# Altium PCB EPS.PcbDoc (part 2 of 2)
Units mm, origin at the board's own origin, x right, y up, seen from the top; angles counter-clockwise.
Board outline 98 x 78 mm, 4 copper layers (Top Layer, GND 1, GND 2, Bottom Layer), stack 1.592 mm thick; 124 components, 111 nets, 472 pads, 878 vias.
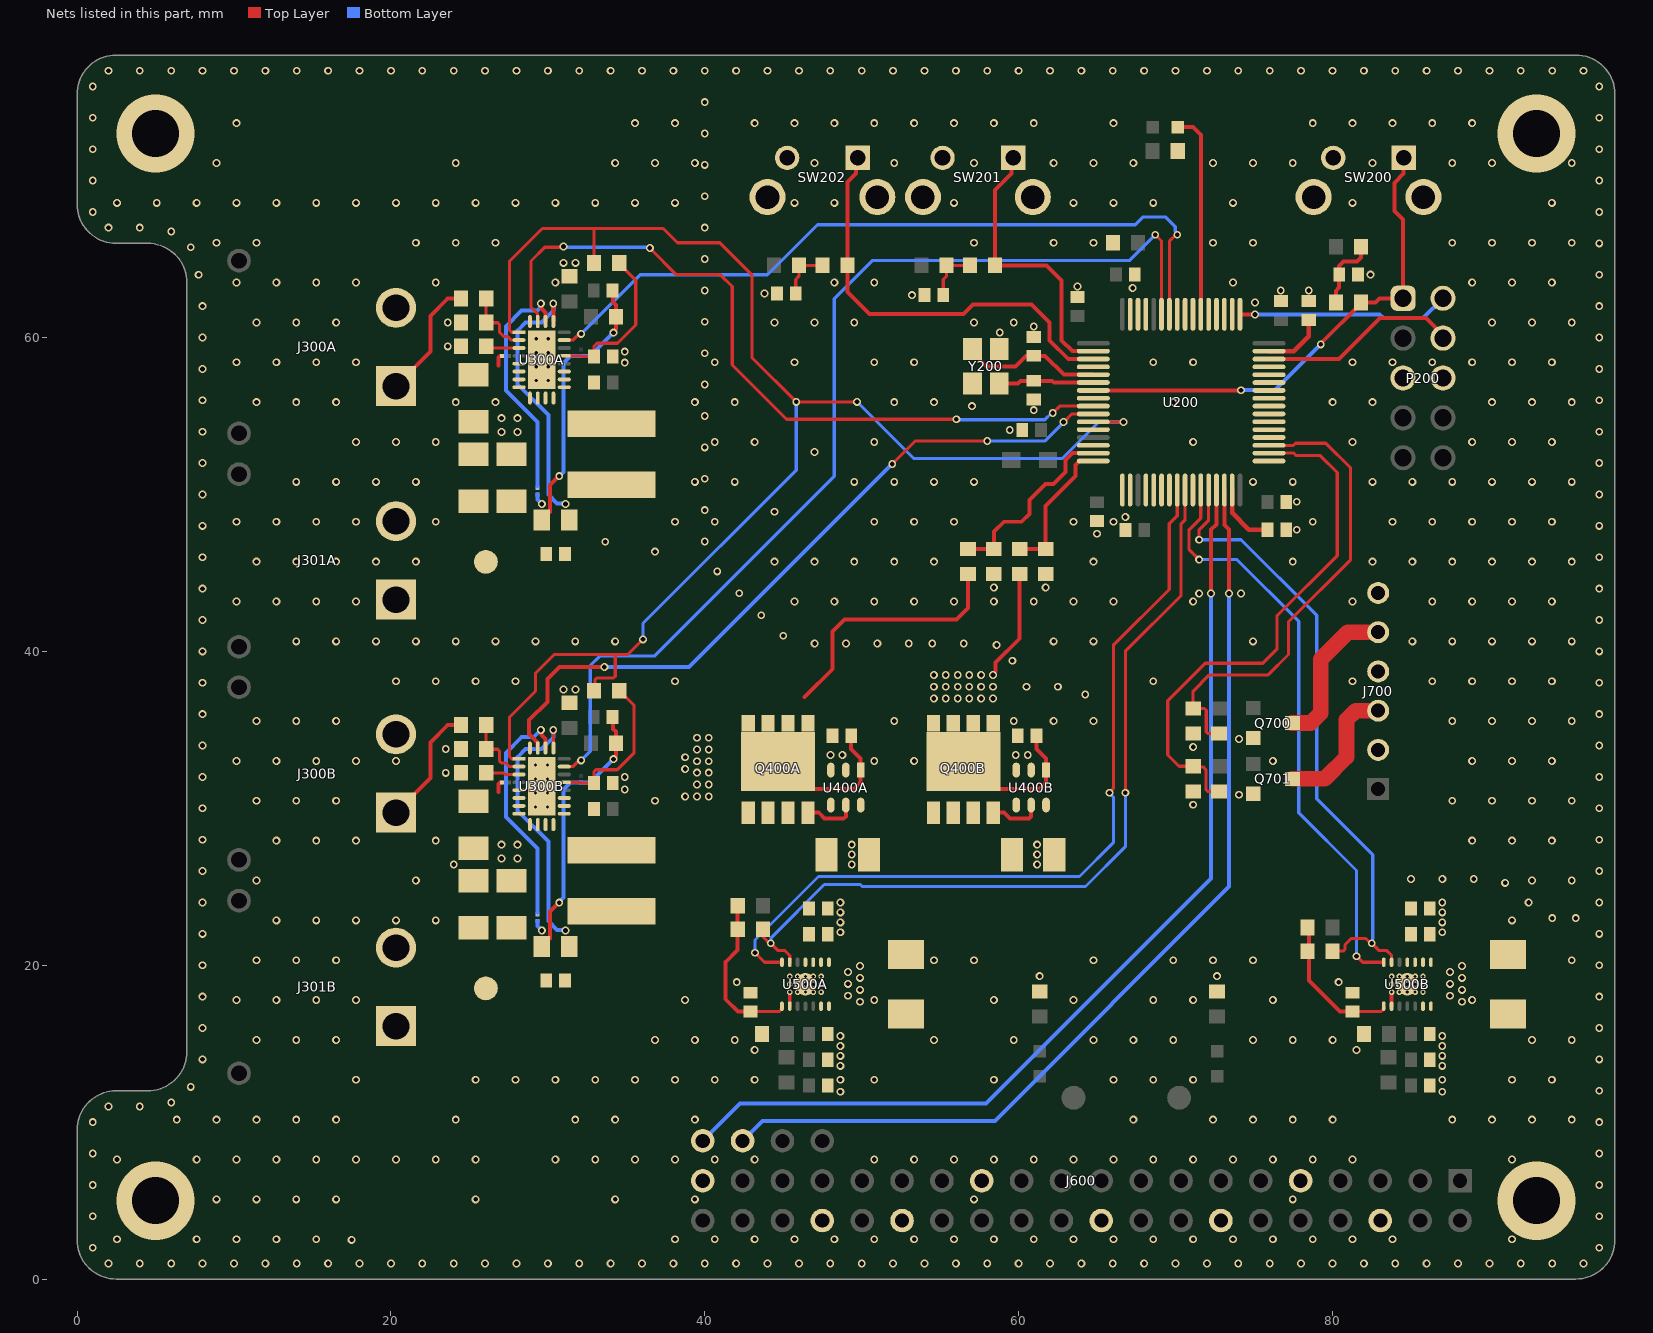
[diagram p4: the nets of this part, all layers, seen from the top]

## Via types
v1: diameter 0.5, hole 0.3, Top Layer to Bottom Layer, tented both sides, 828 vias
v2: diameter 0.35, hole 0.2, Top Layer to Bottom Layer, 30 vias
v3: diameter 0.5, hole 0.2, Top Layer to Bottom Layer, tented both sides, 16 vias
v4: diameter 5, hole 3, Top Layer to Bottom Layer, 4 vias

## Nets (pads, with @x,y where several pads share a name; then routed paths per layer and width w, separated by ;. In a path a pad name is that pad's centre, name@x,y a point inside that pad or via, vN(x,y) a via of type N, cw(c..) or ccw(c..) an arc to the next point about the centre after c; other vN are vias at no path point) (continued)
G_OR_A: Q400A.4 U400A.5 | length 3.4
  Top Layer w0.254: Q400A.4@46.574,29.718 47.263,29.718 47.644,29.337 48.838,29.337 48.987,29.486 U400A.5@48.987,30.209
G_OR_B: Q400B.4 U400B.5 | length 3.4
  Top Layer w0.254: Q400B.4@58.385,29.718 59.074,29.718 59.455,29.337 60.649,29.337 60.798,29.486 U400B.5@60.798,30.209
GND: C200.2 C201.2 C202.2 C203.2 C204.2 C205.2 C206.2 C207.2 C208.2 C209.2 C210.2 C211.2 C212.2 C213.2 C301A.1 C301B.1 C304A.1 C304B.1 C305A.1 C305B.1 C306A.2 C306B.2 C400A.2 C400B.2 C401A.1 C401B.1 C500A.2 C500B.2 C501A.2 C501B.2 C502A.2 C502B.2 C503A.2 C503B.2 C504A.2 C504B.2 C505A.2 C505B.2 J300A.N J300B.N J301A.N J301B.N J600.6 J600.9 J600.14 J600.20 J600.25 J600.30 J600.34 J600.39 J700.6 P200.5 P200.6 Q700.2 Q701.2 R202.1 R203.1 R210.1 R304A.1 R304B.1 R305A.1 R305B.1 R306A.1 R306B.1 R503A.1 R503B.1 R701.1 R703.1 R704.1 R705.1 R706.1 SW200.2 SW200.3 SW200.4 SW201.2 SW201.3 SW201.4 SW202.2 SW202.3 SW202.4 U200.12 U200.18 U200.63 U300A.7 U300A.8 U300A.9 U300A.10 U300A.11 U300A.12 U300A.25 U300B.7 U300B.8 U300B.9 U300B.10 U300B.11 U300B.12 U300B.25 U400A.2 U400A.3 U400B.2 U400B.3 U500A.2 U500A.15 U500B.2 U500B.15 Y200.2 Y200.4 | length 1.8
  Top Layer w0.24: U500A.2@45.414,17.391 v2(45.414,18.291) ; U500B.2@83.768,17.391 v2(83.768,18.291)
  other v1: 2,1 4,1 6,1 8,1 10,1 12,1 14,1 16,1 18,1 20,1 22,1 24,1 26,1 28,1 30,1 32,1 34,1 36,1 38,1 40,1 42,1 44,1 46,1 48,1 50,1 52,1 54,1 56,1 58,1 60,1 62,1 64,1 66,1 68,1 70,1 72,1 74,1 76,1 78,1 80,1 82,1 84,1 86,1 88,1 90,1 92,1 94,1 96,1 1,2 97,2 17.5,2.5 2.54,2.54 7.62,2.54 10.16,2.54 12.7,2.54 15.24,2.54 38.1,2.54 40.64,2.54 43.18,2.54 45.72,2.54 48.26,2.54 50.8,2.54 53.34,2.54 55.88,2.54 58.42,2.54 60.96,2.54 63.5,2.54 66.04,2.54 68.58,2.54 71.12,2.54 73.66,2.54 76.2,2.54 78.74,2.54 81.28,2.54 83.82,2.54 91.44,2.54 1,4 97,4 8.89,5.08 11.43,5.08 13.97,5.08 16.51,5.08 25.4,5.08 34.29,5.08 39.37,5.08 57.15,5.08 77.47,5.08 1,6 97,6 2.54,7.62 7.62,7.62 10.16,7.62 12.7,7.62 15.24,7.62 17.78,7.62 20.32,7.62 22.86,7.62 25.4,7.62 30.48,7.62 33.02,7.62 35.56,7.62 38.1,7.62 40.64,7.62 43.18,7.62 50.8,7.62 53.34,7.62 55.88,7.62 58.42,7.62 60.96,7.62 63.5,7.62 66.04,7.62 68.58,7.62 71.12,7.62 73.66,7.62 76.2,7.62 78.74,7.62 81.28,7.62 91.44,7.62 1,8 97,8 1,10 97,10 6.35,10.16 8.89,10.16 11.43,10.16 13.97,10.16 16.51,10.16 24.13,10.16 31.75,10.16 34.29,10.16 39.37,10.16 67.31,10.16 72.39,10.16 74.93,10.16 77.47,10.16 80.01,10.16 87.63,10.16 90.17,10.16 92.71,10.16 95.25,10.16 2,11 4,11 6,11.25 48.641,11.938 86.995,11.938 97,12 7.25,12.25 17.78,12.7 25.4,12.7 27.94,12.7 30.48,12.7 33.02,12.7 35.56,12.7 38.1,12.7 40.64,12.7 43.18,12.7 48.641,12.7 50.8,12.7 58.42,12.7 66.04,12.7 68.58,12.7 71.12,12.7 86.995,12.7 91.44,12.7 93.98,12.7 48.641,13.589 86.995,13.589 8,14 97,14 48.641,14.224 86.995,14.224 43.18,14.605 81.534,14.605 48.641,14.859 86.995,14.859 11.43,15.24 13.97,15.24 16.51,15.24 36.83,15.24 39.37,15.24 41.91,15.24 54.61,15.24 59.69,15.24 64.77,15.24 67.31,15.24 69.85,15.24 74.93,15.24 77.47,15.24 80.01,15.24 92.71,15.24 95.25,15.24 48.641,15.494 86.995,15.494 8,16 97,16 49.895,17.67 88.249,17.67 10.16,17.78 12.7,17.78 15.24,17.78 17.78,17.78 38.735,17.78 50.8,17.78 58.42,17.78 63.5,17.78 68.58,17.78 71.12,17.78 76.2,17.78 88.9,17.78 8,18 97,18 49.133,18.051 87.487,18.051 49.895,18.432 88.249,18.432 49.133,18.813 87.487,18.813 42.037,18.923 80.391,18.923 49.895,19.194 88.249,19.194 61.341,19.304 72.644,19.304 49.133,19.575 87.487,19.575 49.895,19.956 88.249,19.956 8,20 97,20 11.43,20.32 13.97,20.32 16.51,20.32 54.61,20.32 57.15,20.32 64.77,20.32 69.85,20.32 72.39,20.32 74.93,20.32 95.25,20.32 8,22 97,22 48.641,22.098 86.995,22.098 48.641,22.733 86.995,22.733 12.7,22.86 15.24,22.86 17.78,22.86 20.32,22.86 22.86,22.86 91.44,22.86 94,23 95.5,23 48.641,23.368 86.995,23.368 8,24 48.641,24.003 86.995,24.003 92.5,24 97,24 91,25.25 11.43,25.4 21.59,25.4 92.71,25.4 95.25,25.4 85,25.5 87,25.5 89,25.5 8,26 97,26 24.003,26.416 49.368,26.416 61.179,26.416 27.051,26.797 28.067,26.797 49.368,27.051 61.179,27.051 27.051,27.686 28.067,27.686 49.368,27.686 61.179,27.686 12.7,27.94 15.24,27.94 17.78,27.94 22.86,27.94 88.9,27.94 91.44,27.94 93.98,27.94 8,28 97,28 8,30 97,30 71.12,30.226 11.43,30.48 13.97,30.48 16.51,30.48 36.83,30.48 87.63,30.48 90.17,30.48 92.71,30.48 95.25,30.48 74.041,30.861 34.9,31.2 8,32 34.9,32 97,32 23.495,32.258 10.16,33.02 12.7,33.02 15.24,33.02 17.78,33.02 20.32,33.02 50.8,33.02 53.34,33.02 76.2,33.02 88.9,33.02 91.44,33.02 93.98,33.02 48.006,33.401 48.768,33.401 59.817,33.401 60.579,33.401 23.495,33.782 71.12,33.909 8,34 97,34 74.041,34.417 11.43,35.56 13.97,35.56 16.51,35.56 52.07,35.56 59.69,35.56 62.23,35.56 64.77,35.56 87.63,35.56 90.17,35.56 92.71,35.56 95.25,35.56 8,36 97,36 64.25,37.25 31.003,37.577 31.765,37.577 60.5,37.75 62.5,37.75 8,38 97,38 20.32,38.1 22.86,38.1 25.4,38.1 27.94,38.1 38.1,38.1 68.58,38.1 81.28,38.1 86.36,38.1 88.9,38.1 91.44,38.1 93.98,38.1 59.6,39.4 8,40 97,40 58.6,40.4 47,40.5 49,40.5 51,40.5 53,40.5 54.5,40.5 56.5,40.5 13.97,40.64 16.51,40.64 19.05,40.64 21.59,40.64 24.13,40.64 26.67,40.64 29.21,40.64 31.75,40.64 34.29,40.64 62.23,40.64 64.77,40.64 74.93,40.64 85.09,40.64 87.63,40.64 90.17,40.64 92.71,40.64 95.25,40.64 45,41 8,42 97,42 43.6,42.3 10.16,43.18 12.7,43.18 15.24,43.18 17.78,43.18 45.72,43.18 48.26,43.18 50.8,43.18 53.34,43.18 55.88,43.18 58.42,43.18 60.96,43.18 63.5,43.18 66.04,43.18 71.12,43.18 81.28,43.18 86.36,43.18 88.9,43.18 91.44,43.18 93.98,43.18 42.2,43.7 71.501,43.688 74.168,43.688 8,44 97,44 58.42,44.069 61.722,44.069 40.8,45.1 11.43,45.72 13.97,45.72 16.51,45.72 19.05,45.72 21.59,45.72 44.45,45.72 46.99,45.72 49.53,45.72 52.07,45.72 54.61,45.72 64.77,45.72 77.47,45.72 82.55,45.72 85.09,45.72 87.63,45.72 90.17,45.72 92.71,45.72 95.25,45.72 8,46 97,46 36.83,46.355 33.655,46.99 40,47 65,47.5 77.724,47.752 8,48 97,48 10.16,48.26 12.7,48.26 15.24,48.26 17.78,48.26 22.86,48.26 38.1,48.26 40.64,48.26 50.8,48.26 53.34,48.26 55.88,48.26 63.5,48.26 66.04,48.26 78.74,48.26 83.82,48.26 86.36,48.26 88.9,48.26 91.44,48.26 93.98,48.26 66.802,48.565 44.45,48.895 40,49 77.724,49.53 8,50 97,50 13.97,50.8 16.51,50.8 19.05,50.8 21.59,50.8 39.37,50.8 41.91,50.8 49.53,50.8 52.07,50.8 54.61,50.8 57.15,50.8 74.93,50.8 77.47,50.8 82.55,50.8 85.09,50.8 87.63,50.8 90.17,50.8 92.71,50.8 95.25,50.8 40,51 8,52 97,52 46.99,52.705 40,53 17.78,53.34 20.32,53.34 22.86,53.34 40.64,53.34 43.18,53.34 50.8,53.34 71.12,53.34 81.28,53.34 88.9,53.34 91.44,53.34 93.98,53.34 27.051,53.975 28.067,53.975 8,54 97,54 59.436,54.102 27.051,54.864 28.067,54.864 40,55 60.96,55.372 57.023,55.626 11.43,55.88 13.97,55.88 16.51,55.88 24.13,55.88 26.67,55.88 39.37,55.88 41.91,55.88 52.07,55.88 54.61,55.88 69.85,55.88 80.01,55.88 82.55,55.88 90.17,55.88 92.71,55.88 95.25,55.88 8,56 97,56 40,57 8,58 97,58 34.9,58.4 10.16,58.42 12.7,58.42 15.24,58.42 17.78,58.42 40.64,58.42 45.72,58.42 50.8,58.42 53.34,58.42 68.58,58.42 71.12,58.42 81.28,58.42 83.82,58.42 86.36,58.42 88.9,58.42 91.44,58.42 93.98,58.42 40,59 34.9,59.1 23.622,59.436 8,60 97,60 58.801,60.325 60.96,60.706 11.43,60.96 13.97,60.96 16.51,60.96 23.622,60.96 44.45,60.96 46.99,60.96 49.53,60.96 57.15,60.96 59.69,60.96 90.17,60.96 92.71,60.96 95.25,60.96 40,61 8,62 97,62 75.057,62.23 53.2,62.7 43.8,62.8 40,63 76.708,62.992 78.486,62.992 67.267,63.155 63.754,63.246 10.16,63.5 12.7,63.5 15.24,63.5 17.78,63.5 22.86,63.5 30.48,63.5 48.26,63.5 50.8,63.5 73.66,63.5 88.9,63.5 91.44,63.5 93.98,63.5 7.75,64 82.423,64.008 97,64 31.003,64.755 31.765,64.755 40,65 7.25,65.75 97,66 8.89,66.04 11.43,66.04 21.59,66.04 24.13,66.04 26.67,66.04 57.15,66.04 62.23,66.04 64.77,66.04 72.39,66.04 74.93,66.04 87.63,66.04 90.17,66.04 92.71,66.04 95.25,66.04 6,66.75 2,67 4,67 40,67 1,68 97,68 2.54,68.58 5.08,68.58 7.62,68.58 10.16,68.58 12.7,68.58 15.24,68.58 17.78,68.58 20.32,68.58 22.86,68.58 25.4,68.58 27.94,68.58 30.48,68.58 33.02,68.58 35.56,68.58 38.1,68.58 45.72,68.58 48.26,68.58 55.88,68.58 63.5,68.58 66.04,68.58 68.58,68.58 73.66,68.58 81.28,68.58 93.98,68.58 40,69 1,70 97,70 40,71 8.89,71.12 24.13,71.12 34.29,71.12 36.83,71.12 39.37,71.12 46.99,71.12 52.07,71.12 57.15,71.12 62.23,71.12 64.77,71.12 67.31,71.12 72.39,71.12 74.93,71.12 77.47,71.12 82.55,71.12 87.63,71.12 90.17,71.12 95.25,71.12 1,72 97,72 40,73 10.16,73.66 35.56,73.66 38.1,73.66 43.18,73.66 45.72,73.66 48.26,73.66 50.8,73.66 53.34,73.66 55.88,73.66 58.42,73.66 60.96,73.66 66.04,73.66 78.74,73.66 81.28,73.66 83.82,73.66 86.36,73.66 88.9,73.66 1,74 97,74 40,75 1,76 97,76 2,77 4,77 6,77 8,77 10,77 12,77 14,77 16,77 18,77 20,77 22,77 24,77 26,77 28,77 30,77 32,77 34,77 36,77 38,77 40,77 42,77 44,77 46,77 48,77 50,77 52,77 54,77 56,77 58,77 60,77 62,77 64,77 66,77 68,77 70,77 72,77 74,77 76,77 78,77 80,77 82,77 84,77 86,77 88,77 90,77 92,77 94,77 96,77
  other v2: 45.914,18.291 46.414,18.291 46.914,18.291 47.414,18.291 84.268,18.291 84.768,18.291 85.268,18.291 85.768,18.291 45.414,18.791 45.914,18.791 46.414,18.791 46.914,18.791 47.414,18.791 83.768,18.791 84.268,18.791 84.768,18.791 85.268,18.791 85.768,18.791 45.414,19.291 45.914,19.291 46.414,19.291 46.914,19.291 47.414,19.291 83.768,19.291 84.268,19.291 84.768,19.291 85.268,19.291 85.768,19.291
  other v3: 29.225,30.084 29.987,30.084 29.225,30.973 29.987,30.973 29.225,31.862 29.987,31.862 29.225,32.751 29.987,32.751 29.261,57.252 30.023,57.252 29.261,58.141 30.023,58.141 29.261,59.03 30.023,59.03 29.261,59.919 30.023,59.919
  other v4: 5,5 93,5 5,73 93,73
ICTRLA: U300A.24
ICTRLB: U300B.24
IMON1: U200.9 U300A.23 | length 48.1
  Top Layer w0.2: U300A.23@29.356,61.024 29.348,61.032 29.348,61.508 28.931,61.925 28.931,64.872 29.809,65.75 30.95,65.75 v1(31,65.8) ; v1(36.5,65.7) 38.192,64.008 40.992,64.008 41.75,63.25 41.75,58.25 45.212,54.788 v1(56.032,54.788) ; v1(62.179,55.194) 62.615,55.63 U200.9@64.758,55.63
  Bottom Layer w0.2: v1(31,65.8) 31.05,65.75 36.45,65.75 v1(36.5,65.7) ; v1(56.032,54.788) 56.058,54.762 61.666,54.762 62.098,55.194 v1(62.179,55.194)
IMON2: U200.10 U300B.23 | length 46.9
  Top Layer w0.2: v1(51.943,51.943) 53.4,53.4 v1(58,53.4) ; v1(62.865,54.61) 63.385,55.13 U200.10@64.758,55.13
  Top Layer w0.254: U300B.23@29.356,33.845 29.356,34.195 28.813,34.737 28.813,35.621 29.972,36.779 29.972,38.227 30.745,39 v1(33.6,39)
  Bottom Layer w0.2: v1(58,53.4) 61.655,53.4 v1(62.865,54.61)
  Bottom Layer w0.254: v1(33.6,39) 39,39 v1(51.943,51.943)
INTVccA: C306A.1 R302A.2 U300A.17 | length 10.2
  Top Layer w0.2: U300A.17@31.047,58.833 32.099,58.833 32.146,58.786 C306A.1@32.943,58.786 32.943,59.443 33.136,59.636 34.436,59.636 35.6,60.8 35.6,63.65 34.55,64.7 R302A.2@34.55,64.75
INTVccB: C306B.1 R302B.2 U300B.17 | length 10.1
  Top Layer w0.2: U300B.17@31.047,31.655 32.099,31.655 32.146,31.608 C306B.1@32.943,31.608 32.943,32.341 33.06,32.458 34.418,32.458 35.5,33.54 35.5,36.55 34.95,37.1 34.9,37.1 34.55,37.45 R302B.2@34.55,37.5
ISNA: NT301A.1 U300A.22 | length 15.2
  Top Layer w0.254: v1(29.555,62.164) 29.602,62.117 29.602,61.838 29.856,61.584 U300A.22@29.856,61.024
  Bottom Layer w0.254: NT301A.1@29.337,50.536 29.337,54.61 27.32,56.627 27.32,60.691 28.336,61.707 29.33,61.707 29.508,61.885 29.508,62.117 v1(29.555,62.164)
ISNB: NT301B.1 U300B.22 | length 15.1
  Top Layer w0.254: v1(29.555,34.986) 29.602,34.939 29.602,34.66 29.856,34.406 U300B.22@29.856,33.845
  Bottom Layer w0.254: NT301B.1@29.337,23.358 29.337,27.432 27.32,29.449 27.32,33.513 28.336,34.529 29.098,34.529 v1(29.555,34.986)
ISPA: C302A.1 L300A.2 R300A.1 U300A.21 | length 17
  Top Layer w0.254: v1(30.343,62.164) 30.35,62.157 30.35,61.029 U300A.21@30.356,61.024
  Bottom Layer w0.254: v1(30.343,62.164) 30.368,62.139 30.368,61.707 29.606,60.945 28.59,60.945 28.082,60.437 28.082,57.008 30.038,55.052 30.038,49.994 30.597,49.435 31.083,49.435 v1(31.13,49.388)
ISPB: C302B.1 L300B.2 R300B.1 U300B.21 | length 17
  Top Layer w0.2: v1(30.343,34.986) 30.35,34.979 30.35,33.851 U300B.21@30.356,33.845
  Bottom Layer w0.254: v1(30.343,34.986) 30.368,34.961 30.368,34.529 29.606,33.767 28.59,33.767 28.082,33.259 28.082,29.83 30.038,27.874 30.038,22.816 30.597,22.257 31.083,22.257 v1(31.13,22.21)
L1A: L500A.1 U500A.8 U500A.9
L1B: L500B.1 U500B.8 U500B.9
L2A: L500A.2 U500A.6 U500A.7
L2B: L500B.2 U500B.6 U500B.7
MODE_3V3: R500A.2 U200.25 U500A.13 | length 52.9
  Top Layer w0.2: R500A.2@43.7,22.3 43.7,21.817 43.817,21.7 43.819,21.7 44.119,21.4 v1(44.2,21.4) 44.651,20.949 45.081,20.949 45.414,20.617 U500A.13@45.414,20.191 ; v1(66.802,30.988) 66.802,40.005 70.358,43.561 70.358,48.133 70.612,48.387 70.612,50.276 U200.25@70.608,50.28
  Bottom Layer w0.2: v1(44.2,21.4) 44.228,21.428 44.228,21.749 47.625,25.146 49.911,25.146 50.038,25.019 64.262,25.019 66.802,27.559 v1(66.802,30.988)
MODE_5V: R500B.2 U200.28 U500B.13 | length 40.4
  Top Layer w0.2: v1(71.501,47.117) 71.501,47.752 72.108,48.359 U200.28@72.108,50.28 ; R500B.2@80,20.9 80.683,20.9 80.8,21.017 80.8,21.3 81.2,21.7 82.119,21.7 82.419,21.4 v1(82.5,21.4) 82.951,20.949 83.435,20.949 83.768,20.617 U500B.13@83.768,20.191
  Bottom Layer w0.2: v1(71.501,47.117) 74.168,47.117 78.994,42.291 78.994,30.607 82.568,27.033 82.568,21.667 82.557,21.657 82.557,21.457 v1(82.5,21.4)
NRST: P200.1 R207.1 SW200.1 U200.7 | length 31.7
  Top Layer w0.254: U200.7@64.758,56.63 64.764,56.636 74.162,56.636 v1(74.168,56.642) ; v1(79.248,59.563) 79.248,59.602 81.826,62.18 R207.1@81.826,62.23 82.728,62.23 82.998,62.5 P200.1@84.5,62.5 84.5,67.519 83.947,68.072 83.947,69.85 84.539,70.442 84.539,71.442 SW200.1@84.546,71.449
  Bottom Layer w0.254: v1(74.168,56.642) 76.327,56.642 v1(79.248,59.563)
NRST_NDB: C207.1 R204.1 R207.2 | length 4.7
  Top Layer w0.254: R207.2@80.226,62.23 80.226,62.979 80.426,63.179 C207.1@80.426,64.008 ; C207.1@80.416,64.018 80.416,64.567 80.696,64.846 81.559,64.846 81.826,65.113 R204.1@81.826,65.786
OSC_IN: C211.1 U200.5 Y200.3 | length 9.1
  Top Layer w0.254: Y200.3@57.062,59.266 57.535,58.793 57.535,58.568 57.937,58.166 59.812,58.166 60.482,58.836 61.687,58.836 62.893,57.63 U200.5@64.758,57.63
OSC_OUT: C210.1 U200.6 Y200.1 | length 6.1
  Top Layer w0.254: Y200.1@58.762,57.066 59.95,57.066 60.126,57.242 C210.1@60.96,57.242 62.138,57.242 62.25,57.13 U200.6@64.758,57.13
PA0: U200.14
PA3: U200.17
PA4: U200.20
PA5: U200.21
PA6: U200.22
PA7: U200.23
PA8: U200.41
PA9: U200.42
PA10: U200.43
PA11: U200.44
PA12: U200.45
PA15: U200.50
PB0: U200.26
PB3: U200.55
PB4: U200.56
PB5: U200.57
PB8: U200.61
PB9: U200.62
PB12: U200.33
PB15: U200.36
PC0: U200.8
PC6: U200.37
PC7: U200.38
PC8: U200.39
PC9: U200.40
PC10: U200.51
PC11: U200.52
PC12: U200.53
PC15: U200.4
PG_3V3: U200.24 U500A.14 | length 52.5
  Top Layer w0.2: v1(43.2,20.8) 43.809,20.191 U500A.14@44.914,20.191 ; v1(65.786,30.988) 65.786,31.001 66.04,31.255 66.04,40.386 69.596,43.942 69.596,48.133 70.108,48.645 U200.24@70.108,50.28
  Bottom Layer w0.2: v1(43.2,20.8) 43.2,21.61 47.244,25.654 63.881,25.654 66.04,27.813 66.04,30.721 65.786,30.975 v1(65.786,30.988)
PG_5V: U200.27 U500B.14 | length 37.7
  Top Layer w0.2: v1(71.501,45.847) 70.866,46.482 70.866,47.752 71.608,48.494 U200.27@71.608,50.28 ; v1(81.534,20.574) 81.546,20.574 81.929,20.191 U500B.14@83.268,20.191
  Bottom Layer w0.2: v1(71.501,45.847) 73.914,45.847 77.851,41.91 77.851,29.718 81.534,26.035 v1(81.534,20.574)
PGA: U200.58 U300A.19 | length 48.3
  Top Layer w0.2: U300A.19@31.047,59.833 31.598,59.833 31.942,60.176 32.063,60.176 v1(32.121,60.234) ; U200.58@69.608,61.48 69.608,66.125 70.031,66.548 v1(70.104,66.548)
  Bottom Layer w0.2: v1(32.121,60.234) 35.887,64 44,64 47.183,67.183 67.437,67.183 67.945,67.691 69.342,67.691 69.979,67.054 69.979,66.755 70.104,66.629 v1(70.104,66.548)
PGB: U200.59 U300B.19 | length 66.8
  Top Layer w0.2: U300B.19@31.047,32.655 31.598,32.655 31.942,32.998 32.063,32.998 v1(32.121,33.056) ; v1(68.707,66.548) 69.108,66.147 U200.59@69.108,61.48
  Bottom Layer w0.2: v1(32.121,33.056) 32.7,33.635 32.7,39.1 33.3,39.7 36.779,39.7 48.25,51.171 48.25,62.474 50.673,64.897 67.056,64.897 v1(68.707,66.548)
POWER_O1: J700.5 Q700.3 | length 9.9
  Top Layer w1: Q700.3@77.45,35.433 78.613,35.433 79.248,36.068 79.248,39.497 80.974,41.223 J700.5@82.91,41.223
POWER_O2: J700.3 Q701.3 | length 8.6
  Top Layer w1: Q701.3@77.45,31.877 79.502,31.877 80.899,33.274 80.899,35.637 81.485,36.223 J700.3@82.91,36.223
POWER_sw1: R700.2 R701.2 U200.35 | length 30.7
  Top Layer w0.2: R700.2@72.771,34.76 72.075,34.76 71.958,34.877 71.958,36.243 71.841,36.36 R701.2@71.12,36.36 71.12,37.465 72.155,38.5 75.9,38.5 77.2,39.8 77.2,41.894 81.153,45.847 81.153,51.689 79.578,53.264 77.648,53.264 77.514,53.13 U200.35@75.958,53.13
POWER_sw2: R702.2 R703.2 U200.34 | length 34.5
  Top Layer w0.2: R702.2@72.771,31.077 72.05,31.077 71.933,31.194 71.933,32.461 71.755,32.639 71.158,32.639 R703.2@71.12,32.677 70.223,32.677 69.5,33.4 69.5,36.861 71.882,39.243 75.565,39.243 76.454,40.132 76.454,42.254 80.3,46.1 80.3,51.4 79.224,52.476 77.699,52.476 77.545,52.63 U200.34@75.958,52.63
RTA: R305A.2 U300A.3 | length 2.2
  Top Layer w0.2: R305A.2@26.073,59.436 26.049,59.412 26.049,59.333 U300A.3@28.165,59.333
RTB: R305B.2 U300B.3 | length 2.1
  Top Layer w0.2: R305B.2@26.073,32.258 27.178,32.258 27.281,32.155 U300B.3@28.165,32.155
RX: J600.43 U200.30 | length 63.1
  Top Layer w0.254: U200.30@73.108,50.28 73.108,48.05 73.406,47.752 v1(73.406,43.688)
  Bottom Layer w0.254: J600.43@42.41,8.81 43.68,10.08 58.48,10.08 73.406,25.006 v1(73.406,43.688)
STAT_A: U400A.4
STAT_B: U400B.4
SWA: C300A.2 L300A.1 U300A.13 U300A.14 U300A.15
SWB: C300B.2 L300B.1 U300B.13 U300B.14 U300B.15
SWCLK: P200.2 U200.49 | length 13.6
  Top Layer w0.254: U200.49@74.108,61.48 74.12,61.468 v1(75.057,61.468)
  Bottom Layer w0.254: v1(75.057,61.468) 83.008,61.468 83.237,61.239 85.779,61.239 P200.2@87.04,62.5
SWDIO: P200.4 U200.46 | length 12.8
  Top Layer w0.254: U200.46@75.958,58.63 80.423,58.63 83.033,61.239 85.954,61.239 87.04,60.153 P200.4@87.04,59.96
SYNC_CHRGR: R302A.1 R302B.1 U200.11 U300A.1 U300B.1 | length 96.4
  Top Layer w0.2: U300B.1@28.165,33.155 28.158,33.147 27.686,33.147 27.559,33.274 27.559,35.814 29.21,37.465 29.21,38.608 30.402,39.8 34.3,39.8 ; U300A.1@28.165,60.333 28.157,60.325 27.686,60.325 27.559,60.452 27.559,64.859 29.65,66.95 32.95,66.95 ; R302B.1@32.95,37.5 33,37.55 33,38.183 33.117,38.3 34.183,38.3 34.3,38.417 34.3,39.8 ; R302A.1@32.95,64.75 32.95,66.95 ; v1(36.068,40.767) 35.101,39.8 34.3,39.8 ; v1(49.7,55.9) v1(45.827,55.9) 43,58.727 43,64 40.96,66.04 38.26,66.04 37.35,66.95 32.95,66.95 ; U200.11@64.758,54.63 64.773,54.615 v1(66.685,54.615)
  Bottom Layer w0.2: v1(36.068,40.767) 36.068,41.783 45.827,51.542 v1(45.827,55.9) ; v1(49.7,55.9) 53.3,52.3 62.8,52.3 65.115,54.615 v1(66.685,54.615)
TR/SSA: R301A.1 R304A.2 U300A.2 | length 4.4
  Top Layer w0.2: R304A.2@26.057,60.926 26.057,62.468 R301A.1@26.073,62.484 ; R304A.2@26.073,60.96 26.09,60.943 26.807,60.943 26.924,60.825 26.924,60.325 27.178,60.071 27.432,60.071 27.67,59.833 U300A.2@28.165,59.833
TR/SSB: R301B.1 R304B.2 U300B.2 | length 4.5
  Top Layer w0.2: R304B.2@26.057,33.798 26.057,35.29 R301B.1@26.073,35.306 ; R304B.2@26.073,33.782 26.073,33.765 26.807,33.765 26.924,33.647 26.924,33.01 27.041,32.893 27.315,32.893 27.432,32.776 27.432,32.772 27.549,32.655 U300B.2@28.165,32.655
TX: J600.44 U200.29 | length 64.2
  Top Layer w0.254: v1(72.263,43.688) 72.263,47.752 72.608,48.097 U200.29@72.608,50.28
  Bottom Layer w0.254: J600.44@39.87,8.81 42.236,11.176 57.912,11.176 72.263,25.527 v1(72.263,43.688)
USER_BUTTON_0: R208.1 SW201.1 U200.2 | length 18.1
  Top Layer w0.254: SW201.1@59.654,71.449 59.542,71.337 59.542,70.442 58.5,69.4 R208.1@58.5,64.6 61.765,64.6 62.738,63.627 62.738,59.817 63.425,59.13 U200.2@64.758,59.13
USER_BUTTON_1: R209.1 SW202.1 U200.3 | length 27.4
  Top Layer w0.254: SW202.1@49.748,71.449 49.642,71.343 49.642,70.442 49.1,69.9 R209.1@49.1,64.6 49.1,62.9 50.5,61.5 56.5,61.5 57.103,62.103 60.833,62.103 61.976,60.96 61.976,59.817 63.163,58.63 U200.3@64.758,58.63
USER_LED: D700.2 U200.54 | length 13.1
  Top Layer w0.254: D700.2@70.142,73.406 71.12,73.406 71.608,72.918 U200.54@71.608,61.48
USRB0_NDB: C208.1 R205.1 R208.2 | length 3.5
  Top Layer w0.2: C208.1@55.2,62.7 55.2,63.7 55.4,63.9 R205.1@55.4,64.6 R208.2@56.9,64.6
USRB1_NDB: C209.1 R206.1 R209.2 | length 3.4
  Top Layer w0.2: C209.1@45.8,62.8 45.8,63.7 46,63.9 R206.1@46,64.6 R209.2@47.5,64.6
VBAT1: C302A.2 C303A.1 C304A.2 C305A.2 C400A.1 J301A.P NT301A.2 NT302A.2 Q400A.5 Q400A.6 Q400A.7 Q400A.8 Q400A.9 R200.2 R300A.2 R303A.2 TP300A.1 U400A.1 | length 43
  Top Layer w0.254: 30.147,48.868 30.147,50.589 v1(30.724,51.166) ; C303A.1@34.128,62.992 34.153,62.967 34.153,62.24 34.33,62.063 34.33,61.339 R303A.2@34.343,61.326 34.343,60.542 34.178,60.377 v1(34.178,60.31) ; Q400A.9@44.669,32.976 46.417,31.228 49.52,31.228 49.937,31.645 U400A.1@49.937,32.44 49.937,33.162 49.333,33.766 C400A.1@49.333,34.627 ; 46.37,37.099 48.133,38.862 48.133,41.275 48.895,42.037 56.037,42.037 56.769,42.769 R200.2@56.769,44.92
  Bottom Layer w0.254: NT301A.2@29.337,49.987 29.337,49.669 v1(29.618,49.388) ; v1(30.724,51.166) 31,51.442 31,58.377 31.435,58.811 NT302A.2@32.057,58.811 ; NT302A.2@32.121,58.811 32.679,58.811 v1(34.178,60.31)
VBAT1_DIV: R200.1 R202.2 U200.15 | length 12.1
  Top Layer w0.254: R200.1@56.769,46.52 R202.2@58.42,46.52 58.42,47.625 59.055,48.26 60.198,48.26 60.706,48.768 60.706,49.657 61.722,50.673 62.23,50.673 62.992,51.435 62.992,52.197 63.425,52.63 U200.15@64.758,52.63
VBAT2: C302B.2 C303B.1 C304B.2 C305B.2 C400B.1 J301B.P NT301B.2 NT302B.2 Q400B.5 Q400B.6 Q400B.7 Q400B.8 Q400B.9 R201.2 R300B.2 R303B.2 TP300B.1 U400B.1 | length 33.9
  Top Layer w0.254: 30.147,21.69 30.147,23.411 v1(30.724,23.988) ; C303B.1@34.128,35.814 34.153,35.789 34.153,35.062 34.33,34.885 34.33,34.161 R303B.2@34.343,34.148 34.343,33.364 34.178,33.199 v1(34.178,33.132) ; Q400B.9@56.48,32.976 58.228,31.228 61.331,31.228 61.748,31.645 U400B.1@61.748,32.44 61.748,33.162 61.144,33.766 C400B.1@61.144,34.627 ; v1(58.373,38.5) 58.373,38.567 58.536,38.73 58.536,39.286 60.071,40.821 R201.2@60.071,44.92
  Bottom Layer w0.254: NT301B.2@29.337,22.809 29.337,22.491 v1(29.618,22.21) ; v1(30.724,23.988) 30.724,24.055 31,24.331 31,31.199 31.435,31.633 NT302B.2@32.057,31.633 ; NT302B.2@32.121,31.633 32.679,31.633 v1(34.178,33.132)
  other v1: 38.75,30.75 39.5,30.75 40.25,30.75 39.5,31.512 40.25,31.512 39.5,32.274 40.25,32.274 38.75,32.5 39.5,33 40.25,33 38.75,33.25 39.5,33.75 40.25,33.75 39.5,34.5 40.25,34.5 54.599,37 55.361,37 56.123,37 56.849,37 57.611,37 58.373,37 54.599,37.75 55.361,37.75 56.123,37.75 56.849,37.75 57.611,37.75 58.373,37.75 54.599,38.5 55.361,38.5 56.123,38.5 56.849,38.5 57.611,38.5
VBAT2_DIV: R201.1 R203.2 U200.16 | length 9
  Top Layer w0.254: R201.1@60.071,46.52 R203.2@61.722,46.52 61.722,49.276 63.627,51.181 63.627,51.887 63.87,52.13 U200.16@64.758,52.13
VBUS: C401A.2 C401B.2 C500A.1 C500B.1 C501A.1 C501B.1 J700.2 J700.4 Q400A.1 Q400A.2 Q400A.3 Q400B.1 Q400B.2 Q400B.3 U400A.6 U400B.6 U500A.10 U500A.11 U500B.10 U500B.11 | length 0.2
  Top Layer w1: J700.2@82.91,33.723 J700.2@82.978,33.655 ; J700.4@82.91,38.723 J700.4@82.987,38.646
VCAP_1: C213.1 U200.31 | length 4.1
  Top Layer w0.3: U200.31@73.608,50.28 73.608,48.82 74.676,47.752 C213.1@75.854,47.752
VCAP_2: C212.1 U200.47 | length 4
  Top Layer w0.3: U200.47@75.958,59.13 77.545,59.13 78.486,60.071 C212.1@78.486,61.122
VINA_TPS_A: C505A.1 R500A.1 R502A.1 U500A.1 | length 11
  Top Layer w0.2: C505A.1@42.926,17.053 44.745,17.053 44.914,17.222 U500A.1@44.914,17.391
  Top Layer w0.254: 42.1,22.9 R500A.1@42.1,22.38 ; R502A.1@42.1,23.8 R500A.1@42.1,22.38 ; C505A.1@42.926,17.053 42.11,17.053 41.331,17.832 41.331,20.191 42.1,20.96 R500A.1@42.1,22.3 R500A.1@42.1,22.38
VINA_TPS_B: C505B.1 R500B.1 R502B.1 U500B.1 | length 9.3
  Top Layer w0.2: C505B.1@81.28,17.053 83.099,17.053 83.268,17.222 U500B.1@83.268,17.391
  Top Layer w0.254: R500B.1@78.4,20.9 78.5,20.8 78.5,19.017 80.464,17.053 C505B.1@81.28,17.053 ; R500B.1@78.5,21 R502B.1@78.5,22.3 ; R502B.1@78.5,22.3 R502B.1@78.4,22.4 R502B.1@78.5,22.3
VSOLAR_A: C301A.2 J300A.P NT300A.1 R301A.2 U300A.5 U300A.6 | length 8.6
  Top Layer w0.254: J300A.P@20.315,56.896 22.519,59.1 22.519,61.381 23.622,62.484 R301A.2@24.473,62.484 ; 26.863,58.227 26.863,58.739 26.961,58.837 NT300A.1@27.091,58.837
VSOLAR_B: C301B.2 J300B.P NT300B.1 R301B.2 U300B.5 U300B.6 | length 8.6
  Top Layer w0.254: J300B.P@20.315,29.718 22.519,31.922 22.519,34.203 23.622,35.306 R301B.2@24.473,35.306 ; 26.863,31.049 26.863,31.561 26.961,31.659 NT300B.1@27.091,31.659
pads on no net: J300A.S1 J300A.S2 J300B.S1 J300B.S2 J301A.S1 J301A.S2 J301B.S1 J301B.S2 J600.1 J600.3 J600.5 J600.7 J600.8 J600.10 J600.11 J600.12 J600.13 J600.15 J600.16 J600.17 J600.18 J600.19 J600.21 J600.22 J600.23 J600.24 J600.26 J600.27 J600.28 J600.29 J600.31 J600.32 J600.33 J600.35 J600.36 J600.37 J600.38 J600.40 P200.3

## Polygon pours and split planes (outlines as drawn)
GND on Top Layer "GND_CAP_VBUS" (solid, pour order 289): 62.985,28.116 61.111,28.116 60.858,27.864 60.858,26.264 61.136,25.986 62.985,25.986
GND on Top Layer "GND_CAP_VBUS" (solid, pour order 290): 51.174,28.116 49.3,28.116 49.047,27.864 49.047,26.264 49.325,25.986 51.174,25.986
VBAT1 on Top Layer "VBAT1" (solid, pour order 291): 42.319,31.101 47.019,31.101 47.019,37.665 45.796,38.887 45.796,38.938 45.745,38.938 39.446,45.237 30.658,45.237 30.27,45.625 30.27,45.763 30.27,50.292 24.323,50.292 24.323,46.899 21.986,44.562 19.065,44.562 19.065,42.022 24.775,42.022 24.765,42.012 25.121,41.656 36.601,41.656 42.319,35.938
VBAT2 on Top Layer "VBAT2_t2" (solid, pour order 292): 54.13,31.101 58.83,31.101 58.83,38.706 58.536,39 54.494,39 54.13,38.636 54.13,38.12 54.13,34.851
VBAT2 on Top Layer "VBAT2" (solid, pour order 293): 24.78,14.844 25.273,14.351 33.858,14.351 36.83,17.323 41.072,21.565 41.072,34.493 40.513,35.052 38.608,35.052 38.1,34.544 38.1,30.48 38.329,30.251 38.329,23.241 35.865,20.777 33.68,20.777 32.614,19.71 32.614,18.796 31.902,18.085 30.683,18.085 30.27,18.498 30.27,23.114 24.323,23.114 24.323,19.721 21.986,17.384 19.065,17.384 19.065,14.844
VBUS on Top Layer "VBUS_TOP" (solid, pour order 294): 85.388,20.011 85.398,24.076 83.947,25.527 86.614,28.194 86.614,33.401 85.725,34.29 85.725,38.1 84.582,39.243 82.55,39.243 82.55,38.227 84.201,38.227 84.709,37.719 84.709,34.29 82.677,34.29 82.677,33.147 84.709,33.147 84.709,30.099 82.042,27.432 67.31,27.432 64.253,30.489 58.81,30.489 58.81,30.443 42.164,30.443 42.164,27.178 44.958,24.384 44.958,22.896 46.015,21.84 46.015,21.027 46.294,20.748 46.294,20.011 46.414,19.891 46.914,19.891 47.034,20.011 47.039,23.503 47.041,23.503 47.041,24.435 47.244,24.638 49.784,24.638 51.181,23.241 66.012,23.241 82.528,23.241 84.648,21.121 84.648,20.011 84.768,19.891 85.148,19.891 85.268,19.891
5V on Top Layer "5V_t" (solid, pour order 295): 84.61,3.195 85.325,2.48 89.469,2.48 90.057,3.068 90.071,3.068 90.071,7.894 89.055,8.91 86.721,8.91 85.416,10.215 85.388,14.428 85.388,17.571 85.268,17.691 84.768,17.691 84.648,17.571 84.653,17.463 84.648,17.464 84.648,13.563 84.066,12.981 83.082,12.981 83.066,12.985 83.066,6.088 84.61,4.544
3,3V on Top Layer "NONET_L01_P-001" (solid, pour order 296): 43.942,11.684 43.942,8.255 44.45,7.747 48.006,7.747 48.514,8.255 48.514,10.541 48.133,10.922 47.625,10.922 46.863,11.684
GND on Top Layer "GND_L01_P297" (solid, pour order 297): 47.839,18.791 47.842,18.788 50.454,18.788 50.454,20.379 49.412,20.379 48.414,19.381 47.839,19.381
GND on Top Layer "GND_L01_P298" (solid, pour order 298): 47.839,18.791 47.842,18.794 50.454,18.794 50.454,17.203 49.412,17.203 48.414,18.201 47.839,18.201
L1A on Top Layer "L1A_L01_P299" (solid, pour order 299): 47.294,20.011 47.414,19.891 48.535,19.891 49.285,20.642 53.941,20.642 53.975,20.676 53.975,21.693 53.553,22.115 49.387,22.115 47.888,20.616 47.482,20.616 47.294,20.428
L2A on Top Layer "L2A_L01_P300" (solid, pour order 300): 47.293,17.571 47.413,17.691 48.533,17.691 49.284,16.94 53.939,16.94 53.975,16.904 53.975,15.891 53.551,15.467 49.386,15.467 47.887,16.966 47.481,16.966 47.293,17.154
VSOLAR_A on Top Layer "Top Layer-VSOLAR_A" (solid, pour order 301): 26.825,56.869 27.668,57.712 28.46,57.712 28.581,57.833 28.581,58.333 28.483,58.43 21.834,58.43 19.024,55.621 21.64,55.621 22.888,56.869
VSOLAR_B on Top Layer "Top Layer-VSOLAR_B" (solid, pour order 302): 26.825,29.691 27.668,30.534 28.46,30.534 28.581,30.655 28.581,31.155 28.483,31.252 21.834,31.252 19.024,28.443 21.64,28.443 22.888,29.691
SWA on Top Layer "SWA_L01_P303" (solid, pour order 303): 36.851,55.363 36.337,55.865 33.721,55.865 33.314,56.271 33.314,57.585 32.943,57.585 31.899,57.585 31.53,57.954 30.752,57.954 30.631,57.833 30.631,56.833 31.257,56.144 31.251,53.663 36.851,53.663
ISPA on Top Layer "ISPA_L01_P304" (solid, pour order 304): 30.749,49.515 31.251,50.017 31.251,51.463 36.851,51.463 36.851,49.763 35.702,48.626 33.416,48.626 31.892,47.102 31.892,46.086 31.47,45.763 30.715,45.763
SWB on Top Layer "SWB_L01_P305" (solid, pour order 305): 36.851,28.185 36.337,28.687 33.721,28.687 33.314,29.093 33.314,30.407 32.943,30.407 31.899,30.407 31.53,30.776 30.752,30.776 30.631,30.655 30.631,29.655 31.257,28.966 31.251,26.485 36.851,26.485
ISPB on Top Layer "ISPB_L01_P306" (solid, pour order 306): 30.749,22.337 31.251,22.839 31.251,24.285 36.851,24.285 36.851,22.585 35.702,21.448 33.416,21.448 31.892,19.924 31.892,18.908 31.47,18.585 30.715,18.585
3,3V on Top Layer "NONET_L01_P-001" (solid, pour order 308): 47.034,15.734 47.015,11.049 43.942,11.049 43.942,12.497 44.43,12.985 45.776,12.985 46.076,13.284 46.076,16.739 46.294,16.972 46.294,17.571 46.414,17.691 46.914,17.691 47.034,17.571
GND on Top Layer "GND_L01_P309" (solid, pour order 309): 86.193,18.791 86.196,18.788 88.808,18.788 88.808,20.379 87.766,20.379 86.768,19.381 86.193,19.381
GND on Top Layer "GND_L01_P310" (solid, pour order 310): 86.193,18.791 86.196,18.794 88.808,18.794 88.808,17.203 87.766,17.203 86.768,18.201 86.193,18.201
L1B on Top Layer "L1B_L01_P311" (solid, pour order 311): 85.648,20.011 85.768,19.891 86.889,19.891 87.639,20.642 92.295,20.642 92.329,20.676 92.329,21.693 91.907,22.115 87.741,22.115 86.242,20.616 85.836,20.616 85.648,20.428
L2B on Top Layer "L2B_L01_P312" (solid, pour order 312): 85.647,17.571 85.767,17.691 86.887,17.691 87.638,16.94 92.293,16.94 92.329,16.904 92.329,15.891 91.905,15.467 87.74,15.467 86.241,16.966 85.835,16.966 85.647,17.154
GND on Top Layer "GND_PLANE_TOP" (solid, pour order 313): 2.5,0 95.5,0 ccw(c95.5,2.5) 98,2.5 98,75.5 ccw(c95.5,75.5) 95.5,78 2.5,78 ccw(c2.5,75.5) 0,75.5 0,68.5 ccw(c2.5,68.5) 2.5,66 4.5,66 cw(c4.5,63.5) 7,63.5 7,14.5 cw(c4.5,14.5) 4.5,12 2.5,12 ccw(c2.5,9.5) 0,9.5 0,2.5 ccw(c2.5,2.5)
VBAT2 on Bottom Layer "VBAT2_b" (solid, pour order 315): 40.5,30.25 40.75,30.5 40.75,32.5 44.826,36.576 54.356,36.576 58.547,36.576 58.801,36.83 58.801,38.735 58.039,39.497 43.247,39.497 38.25,34.5 38.25,30.5 38.5,30.25
GND on Bottom Layer "GND_PLANE_BOTTOM" (solid, pour order 316): 2.5,0 95.5,0 ccw(c95.5,2.5) 98,2.5 98,75.5 ccw(c95.5,75.5) 95.5,78 2.5,78 ccw(c2.5,75.5) 0,75.5 0,68.5 ccw(c2.5,68.5) 2.5,66 4.5,66 cw(c4.5,63.5) 7,63.5 7,14.5 cw(c4.5,14.5) 4.5,12 2.5,12 ccw(c2.5,9.5) 0,9.5 0,2.5 ccw(c2.5,2.5)
GND on GND 2 "GND_PLANE_MID2" (solid, pour order 314): 2.5,0 95.5,0 ccw(c95.5,2.5) 98,2.5 98,75.5 ccw(c95.5,75.5) 95.5,78 2.5,78 ccw(c2.5,75.5) 0,75.5 0,68.5 ccw(c2.5,68.5) 2.5,66 4.5,66 cw(c4.5,63.5) 7,63.5 7,14.5 cw(c4.5,14.5) 4.5,12 2.5,12 ccw(c2.5,9.5) 0,9.5 0,2.5 ccw(c2.5,2.5)
GND on GND 1 "GND_PLANE_MID1" (solid, pour order 307): 2.5,0 95.5,0 ccw(c95.5,2.5) 98,2.5 98,75.5 ccw(c95.5,75.5) 95.5,78 2.5,78 ccw(c2.5,75.5) 0,75.5 0,68.5 ccw(c2.5,68.5) 2.5,66 4.5,66 cw(c4.5,63.5) 7,63.5 7,14.5 cw(c4.5,14.5) 4.5,12 2.5,12 ccw(c2.5,9.5) 0,9.5 0,2.5 ccw(c2.5,2.5)

## Silkscreen, mask and mechanical layers (free items; w line width, h text height)
Top Overlay:
  circle w0.254: c36.035,12.15 r0.424
  lines w0.254: 11.43,68.961 10.795,68.961 10.795,74.422 11.43,74.422 ; 18.532,8.486 17.932,8.486 17.932,4.086 37.032,4.086 37.032,8.486 33.432,8.486 ; 18.532,8.986 17.932,8.986 17.932,13.686 18.532,13.686 ; 22.733,68.961 23.368,68.961 23.368,74.422 22.733,74.422 ; 25.732,13.686 37.032,13.686 37.032,8.986 33.432,8.986 ; 25.908,68.961 25.273,68.961 25.273,74.422 25.908,74.422 ; 32.258,68.961 32.893,68.961 32.893,74.422 32.258,74.422
  text "USER LED" at 65.978,74.168 h2
  text "Solar input voltage range: 3.4V to 42V" at 10.351,68.834 h2
  text "Battery: / Li-Ion 1S" at 24.575,68.834 h2
  text "USER BTN 1" at 42.418,66.804 h2 r90
  text "USER BTN 0" at 64.262,66.804 h2 r90
  text "RESET" at 77.216,66.804 h2 r90
  text "SOLAR 1" at 11.74,64.522 h2
  text "BAT 1" at 11.74,50.922 h2
  text "VBAT1" at 24.073,46.804 h1.6
  text "SOLAR 2" at 11.74,37.322 h2
  text "BAT 2" at 11.709,23.759 h2
  text "VBAT2" at 23.974,19.603 h1.6
  text "Cubesat" at 18.901,13.254 h1
  text "3V3" at 62.052,12.827 h2
  text "5V" at 68.529,12.827 h2
  text "EPS Board" at 18.955,11.53 h1
  text "V 0.1 (beta)" at 18.955,10.006 h1
  text "Project Author:" at 18.967,8.394 h1
  text "Dominik Pluta" at 18.886,6.54 h1
  text "DESIGNED IN POLAND" at 18.886,4.84 h0.8
  text ".ModifiedDate" at 17.832,2.186 h2
Bottom Overlay:
  lines w0.254: 75.692,39.37 78.232,39.37 78.232,43.688 81.975,43.688 ; 75.956,39.884 78.232,35.56 78.232,31.2 81.975,31.2 ; 83.845,33.684 92.1,33.684 92.1,36.224 90.703,36.224 ; 83.845,36.224 85.623,36.224 ; 83.845,38.684 92.1,38.684 92.1,41.224 90.703,41.224 ; 83.845,41.224 85.623,41.224 ; 85.623,35.208 85.623,37.24 90.703,37.24 90.703,35.208 85.623,35.208 ; 85.623,40.208 90.703,40.208 90.703,42.24 85.623,42.24 85.623,40.208
  text "NRST" at 83.269,61.899 h1.8
  text "SWCLK" at 93.072,61.899 h1.8
  text "SWDIO" at 93.032,59.359 h1.8
  text "(NC)" at 83.286,59.339 h1.8
  text "GND" at 83.281,56.819 h1.8
  text "GND" at 91.536,56.819 h1.8
  text "3V3 (NC)" at 83.205,54.259 h1.8
  text "3V3 (NC)" at 94.762,54.259 h1.8
  text "5V (NC)" at 83.175,51.719 h1.8
  text "5V (NC)" at 93.97,51.719 h1.8
Top Solder:
  the board outline again, w4
Bottom Solder:
  the board outline again, w4
Mechanical 1:
  the board outline again, w0.254
Dimensions:
  lines w1: 40,46.604 40,77 ; 40,46.707 40,47 ; 40,46.854 ccw(c42.302,46.854) 40.674,45.226 44.502,41.398 ccw(c46.67,43.566) 46.67,40.5 58.146,40.5 cw(c58.146,39.646) 58.75,40.25 59.573,39.427 cw(c59.146,39) 59.75,39 59.75,38.604 ccw(c60.604,38.604) 60,38 ccw(c60.604,38.604) 60.604,37.75 63.043,37.75 cw(c63.043,36.043) 64.25,37.25
Top Courtyard:
  lines w0.254: 0,0 10,0 10,10 0,10 0,0 ; 0,68 10,68 10,78 0,78 0,68 ; 88,0 98,0 98,10 88,10 88,0 ; 88,68 98,68 98,78 88,78 88,68

## Dimensions
0,68.5 to 7,63.5 on Dimensions
93,5 to 88.13,6.27 on Dimensions
93,5 to 88.13,6.27 on Dimensions
98,0 to 98,78 on Dimensions
0,0 to 98,0 on Dimensions

## Text inside footprints (layer, text, board x,y; h text height)
J600: Bottom Overlay "1" at 88.265,8.001 h1.27